# Altium PCB PCB1.PcbDoc (part 2 of 2)
Units mm, origin at the board's own origin, x right, y up, seen from the top; angles counter-clockwise.
Board outline 48.25 x 48.25 mm, 4 copper layers (Top Layer, Mid Layer 1, Mid Layer 2, Bottom Layer), stack 1.57 mm thick; 80 components, 62 nets, 377 pads, 167 vias.
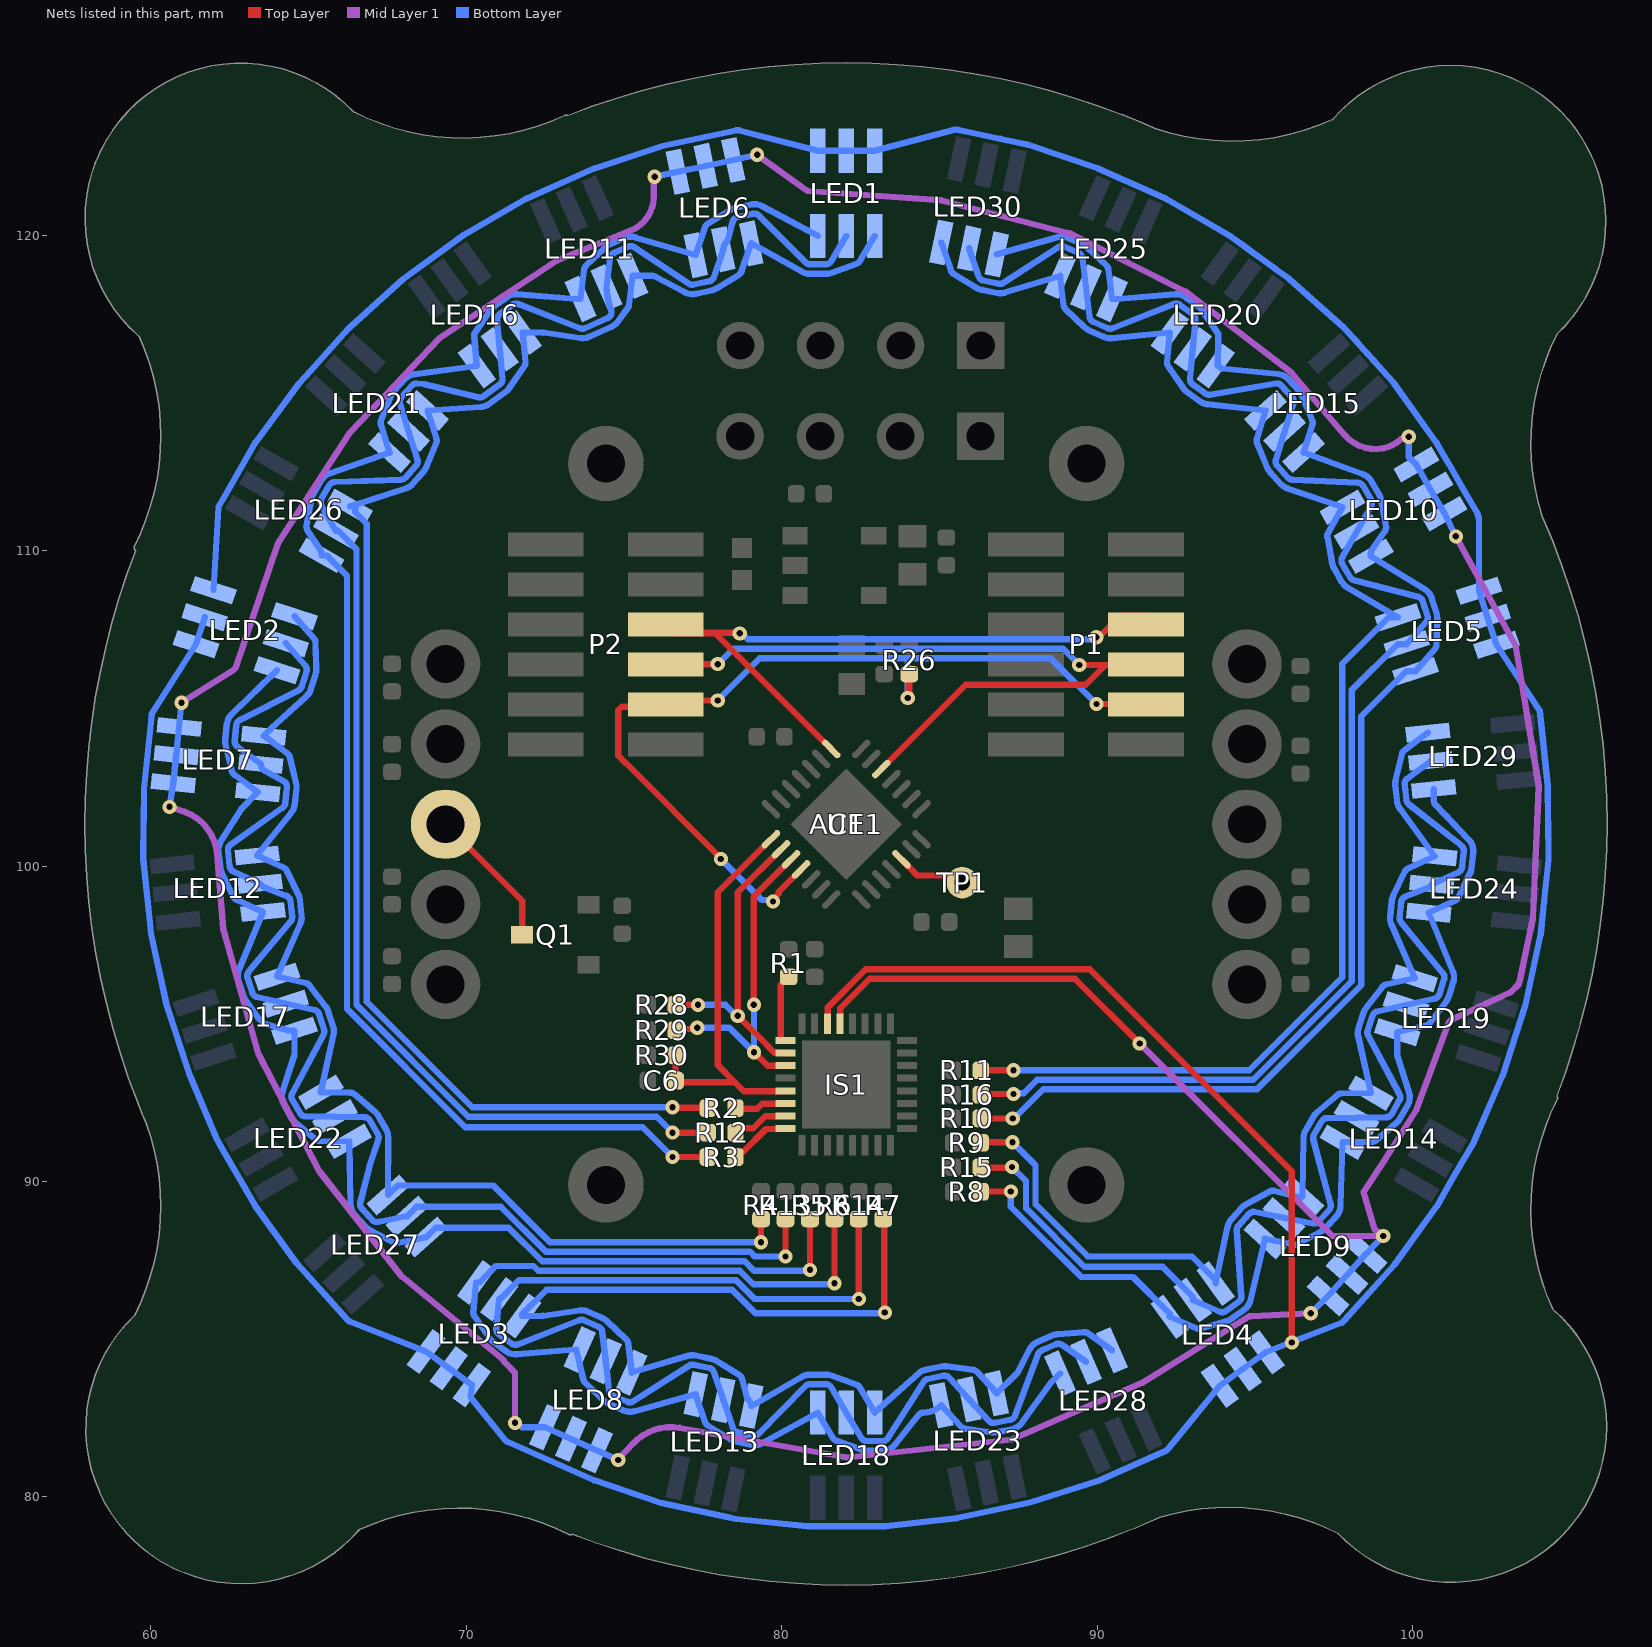
[diagram p4: the nets of this part, all layers, seen from the top]

## Via types
v1: diameter 0.45, hole 0.2, Top Layer to Bottom Layer, 130 vias
v2: diameter 0.6, hole 0.3, Top Layer to Bottom Layer, 24 vias
v3: diameter 6, hole 4, Top Layer to Bottom Layer, 4 vias
v4: diameter 0.5, hole 0.2, Top Layer to Bottom Layer, 4 vias
v5: diameter 0.66, hole 0.33, Top Layer to Bottom Layer, tented top, 4 vias
v6: diameter 0.7, hole 0.5, Top Layer to Bottom Layer, 1 vias

## Nets (pads, with @x,y where several pads share a name; then routed paths per layer and width w, separated by ;. In a path a pad name is that pad's centre, name@x,y a point inside that pad or via, vN(x,y) a via of type N, cw(c..) or ccw(c..) an arc to the next point about the centre after c; other vN are vias at no path point) (continued)
NetIS1_21: IS1.21 LED6.1 LED6.3 LED6.5 LED7.1 LED7.3 LED7.5 LED8.1 LED8.3 LED8.5 LED9.1 LED9.3 LED9.5 LED10.1 LED10.3 LED10.5 | length 157.6
  Top Layer w0.2: IS1.21@81.85,95 81.86,95.01 81.86,95.49 82.797,96.426 89.299,96.426 v1(91.35,94.375)
  Mid Layer 1 w0.2: v1@60.601,101.875 60.612,101.876 cw(c60.616,101.676) 60.686,101.863 61.083,101.717 61.085,101.716 cw(c60.549,100.25) 62.104,100.383 62.104,100.382 62.3,98 62.305,97.981 63.425,94.025 63.434,94.007 65.35,90.325 65.361,90.31 67.944,87.008 67.959,86.992 67.967,86.986 71.166,84.353 71.204,84.315 71.219,84.275 71.55,83.944 v1(71.55,82.35) ; v1(60.975,105.175) 62.616,106.212 62.634,106.224 ; 62.683,106.273 64.042,110.227 64.05,110.25 66.315,113.735 66.325,113.75 69.159,116.733 69.161,116.735 ; 69.177,116.751 69.244,116.796 72.884,119.196 cw(c72.994,119.029) 72.919,119.215 75.216,120.144 75.217,120.145 ccw(c74.778,121.231) 75.95,121.23 75.95,121.233 75.95,121.825 v1(75.975,121.85) ; v1(74.825,81.175) cw(c75.005,81.087) 74.858,81.223 75.3,81.698 cw(c76.485,80.597) 76.767,82.19 76.769,82.19 81.985,81.266 82.064,81.252 82.093,81.252 82.104,81.253 87.3,81.825 87.328,81.837 91.45,83.625 91.463,83.633 94.825,85.725 94.877,85.728 v1(96.775,85.825) ; v1(79.225,122.55) 80.779,121.433 80.825,121.4 85.057,121.101 85.075,121.1 89.129,120.055 89.15,120.05 89.198,120.026 92.808,118.208 92.825,118.2 92.85,118.181 96.14,115.658 ; v1(91.35,94.375) 97.45,88.275 v1(99.075,88.275) 98.797,88.487 98.45,89.675 98.483,89.725 99.068,90.614 100.125,92.275 100.132,92.295 101.162,95.064 101.217,95.12 101.25,95.135 103.112,95.998 103.377,96.263 103.374,96.302 ccw(c103.202,96.404) 103.398,96.362 103.819,98.361 103.82,98.401 103.998,102.525 103.283,106.925 103.275,106.975 103.259,107.005 v1(101.375,110.45) ; 96.17,115.629 97.844,113.666 ccw(c98.818,114.501) 99.073,113.244 99.076,113.245 ccw(c98.844,114.372) 99.605,113.508 cw(c99.737,113.358) 99.737,113.558 99.834,113.558 v1(99.882,113.606)
  Bottom Layer w0.2: v1(60.6,101.875) LED7.1@60.713,102.621 LED7.3@60.807,103.516 LED7.5@60.901,104.411 v1(60.975,105.175) ; v1(71.55,82.35) 71.618,82.35 71.76,82.208 LED8.5@72.504,82.208 LED8.3@73.326,81.842 LED8.1@74.148,81.476 v1(74.825,81.175) ; v1(75.975,121.85) LED6.1@76.714,122.008 LED6.3@77.594,122.195 LED6.5@78.475,122.383 v1(79.225,122.55) ; v1(96.775,85.825) LED9.5@97.326,86.378 LED9.3@97.928,87.047 LED9.1@98.53,87.716 v1(99.075,88.275) ; v1(99.882,113.606) 99.882,112.966 LED10.1@100.119,112.729 LED10.3@100.569,111.95 LED10.5@101.019,111.171 v1(101.375,110.45)
NetIS1_22: IS1.22 LED1.1 LED1.3 LED1.5 LED2.1 LED2.3 LED2.5 LED3.1 LED3.3 LED3.5 LED4.1 LED4.3 LED4.5 LED5.1 LED5.3 LED5.5 | length 163.5
  Top Layer w0.2: IS1.22@81.45,95 81.46,95.01 81.46,95.516 82.672,96.728 89.772,96.728 96.175,90.325 v1(96.175,84.9)
  Bottom Layer w0.2: LED2.3@61.716,107.892 LED2.1@61.438,107.036 60.038,104.825 60.01,104.559 59.789,102.456 59.764,100.313 59.764,100.219 59.978,98.189 60.013,97.85 60.493,95.653 61.229,93.389 62.123,91.292 62.291,91.001 63.313,89.23 64.63,87.406 66.225,85.635 66.288,85.572 LED3.5@68.728,84.612 LED3.3@69.456,84.083 LED3.1@70.185,83.554 LED3.1@70.152,83.23 ; LED2.5@61.994,108.748 62.148,111.383 62.311,111.666 63.338,113.445 64.68,115.269 64.915,115.53 66.275,117.04 66.338,117.103 68.008,118.611 68.149,118.714 69.935,120.011 71.899,121.149 72.133,121.253 74.074,122.117 76.224,122.826 76.526,122.89 78.552,123.321 78.657,123.321 LED1.1@81.15,122.675 LED1.3@82.05,122.675 LED1.5@82.95,122.675 85.475,123.339 ; LED3.1@70.152,83.229 ccw(c70.351,83.209) 70.195,83.084 71.235,81.809 ccw(c71.389,81.936) 71.308,81.753 74.049,80.533 76.224,79.799 78.237,79.371 78.552,79.304 80.816,79.073 83.284,79.073 85.548,79.329 85.786,79.38 87.876,79.824 90.026,80.508 92.201,81.476 92.286,81.561 LED4.5@93.89,83.529 LED4.3@94.619,84.058 LED4.1@95.347,84.587 96.172,84.907 97.762,85.522 97.825,85.585 99.42,87.356 100.762,89.205 101.314,90.161 101.952,91.267 102.846,93.339 103.582,95.603 104.062,97.825 104.171,98.868 104.311,100.194 104.311,100.288 104.286,102.556 104.037,104.925 LED5.5@102.662,107.011 LED5.3@102.384,107.867 LED5.1@102.106,108.723 102.106,110.993 ccw(c101.906,110.993) 102.096,111.054 102.066,111.15 ccw(c101.875,111.091) 102.048,111.192 101.675,111.837 ccw(c101.5,111.737) 101.675,111.838 101.225,112.616 ccw(c101.05,112.517) 101.225,112.618 101.025,112.963 ; 85.569,123.341 86.056,123.238 ; 86.058,123.237 86.937,123.051 ; 86.938,123.05 87.817,122.863 ; 87.842,122.857 90.047,122.107 ; 90.066,122.099 91.709,121.368 ; 91.71,121.367 92.166,121.164 ; 92.186,121.154 94.2,119.984 ; 94.218,119.973 94.623,119.679 ; 94.623,119.678 94.945,119.444 ; 94.946,119.444 95.351,119.15 ; 95.351,119.149 95.674,118.915 ; 95.674,118.915 96.079,118.621 ; 96.095,118.608 97.838,117.052 ; 97.854,117.036 98.188,116.665 98.456,116.368 98.791,115.996 99.058,115.699 ; 99.058,115.699 99.393,115.327 ; 99.407,115.309 100.764,113.414 ; 100.775,113.397 101.025,112.964
NetIS1_25: IS1.25 R1.1 | length 2.3
  Top Layer w0.2: IS1.25@80.125,94.475 79.985,94.475 79.975,94.485 79.975,96.235 80.064,96.324 80.064,96.327 80.221,96.485 R1.1@80.225,96.485
NetIS1_30: IS1.30 R2.1 | length 1.6
  Top Layer w0.2: R2.1@78.545,92.304 79.224,92.304 79.386,92.466 IS1.30@80.117,92.466
NetIS1_31: IS1.31 R12.1 | length 1.8
  Top Layer w0.2: R12.1@78.545,91.542 78.693,91.69 79.105,91.69 79.481,92.066 IS1.31@80.117,92.066
NetIS1_32: IS1.32 R3.1 | length 1.9
  Top Layer w0.2: R3.1@78.545,90.78 78.545,90.784 78.703,90.941 78.783,90.941 79.508,91.666 IS1.32@80.117,91.666
NetLED1_2: LED1.2 LED6.2 LED11.2 LED16.2 LED21.2 LED26.2 R3.2 | length 53
  Top Layer w0.2: v1@76.55,90.775 R3.2@77.66,90.775
  Bottom Layer w0.2: v1@76.55,90.775 75.6,91.725 69.975,91.725 66.225,95.475 66.225,109.204 65.584,109.846 LED26.2@65.419,109.846 65.419,109.894 ccw(c65.219,109.894) 65.386,110.003 64.969,110.649 cw(c65.138,110.758) 64.94,110.795 65.093,111.629 cw(c65.588,111.538) 65.151,111.788 65.403,112.224 cw(c65.838,111.971) 65.674,112.447 LED21.2@67.576,113.103 67.298,113.994 cw(c67.491,114.054) 67.304,114.131 67.628,114.915 cw(c68.093,114.723) 67.719,115.06 68.054,115.431 cw(c68.428,115.095) 68.362,115.594 70.327,115.854 LED16.2@70.34,115.854 70.254,116.784 cw(c70.455,116.802) 70.289,116.916 70.767,117.615 cw(c71.183,117.331) 70.887,117.738 71.292,118.032 cw(c71.587,117.625) 71.629,118.127 73.498,117.976 ccw(c73.514,118.176) 73.514,117.976 LED11.2@73.627,117.976 73.736,118.903 cw(c73.936,118.88) 73.797,119.026 74.411,119.61 cw(c74.758,119.246) 74.553,119.705 75.011,119.909 cw(c75.215,119.449) 75.359,119.931 LED6.2@77.275,119.367 77.575,120.252 cw(c77.766,120.187) 77.66,120.359 78.382,120.803 cw(c78.645,120.376) 78.542,120.867 79.03,120.97 cw(c79.135,120.48) 79.135,120.981 cw(c79.136,120.48) 79.373,120.922 LED1.2@81.15,119.975
  other v1: 76.544,90.775
NetLED1_4: LED1.4 LED6.4 LED11.4 LED16.4 LED21.4 LED26.4 R12.2 | length 57.1
  Top Layer w0.2: v1@76.55,91.55 R12.2@77.66,91.55
  Bottom Layer w0.2: 68.649,115.28 68.648,115.28 68.443,115.296 ccw(c68.428,115.095) 68.278,115.23 67.943,114.858 ccw(c68.093,114.723) 67.901,114.663 LED21.4@68.178,113.772 68.456,112.881 cw(c68.264,112.82) 68.413,112.685 68.079,112.314 cw(c67.929,112.449) 67.936,112.247 65.832,112.172 ccw(c65.838,111.971) 65.663,112.072 65.413,111.639 ccw(c65.588,111.538) 65.412,111.439 LED26.4@65.869,110.625 65.941,110.625 66.527,110.04 66.527,95.6 70.072,92.055 76.045,92.055 v1@76.55,91.55 ; 68.68,115.275 70.386,114.859 ccw(c70.433,115.054) 70.55,114.892 71.073,115.271 ccw(c70.954,115.434) 71.155,115.453 LED16.4@71.069,116.383 70.982,117.313 cw(c71.183,117.331) 71.064,117.494 71.469,117.788 cw(c71.587,117.625) 71.662,117.812 73.609,117.047 ccw(c73.683,117.234) 73.765,117.05 74.49,117.373 ccw(c74.409,117.556) 74.596,117.625 cw(c76.896,118.47) LED11.4@74.449,118.342 74.558,119.269 cw(c74.758,119.246) 74.676,119.43 75.133,119.633 cw(c75.215,119.449) 75.327,119.616 77.065,118.463 ccw(c77.176,118.631) 77.218,118.434 77.707,118.537 ccw(c77.665,118.735) 77.856,118.67 LED6.4@78.156,119.555 cw(c78.46,119.555) 78.245,119.77 ccw(c78.104,119.912) 78.297,119.86 78.43,120.349 78.437,120.375 ; 78.438,120.377 78.451,120.426 cw(c78.644,120.375) 78.504,120.517 cw(c78.645,120.376) 78.605,120.572 79.094,120.676 cw(c79.135,120.48) 79.136,120.68 cw(c79.136,120.48) 79.278,120.621 79.294,120.604 cw(c79.153,120.463) 79.305,120.593 79.337,120.555 ccw(c79.488,120.686) 79.347,120.545 80.742,119.15 ccw(c80.9,119.275) 80.746,119.144 ccw(c80.9,119.275) 80.9,119.073 81.4,119.073 ccw(c81.4,119.275) 81.574,119.172 LED1.4@82.05,119.975
  other v1: 76.544,91.55
NetLED1_6: LED1.6 LED6.6 LED11.6 LED16.6 LED21.6 LED26.6 R2.2 | length 51.7
  Top Layer w0.2: v1(76.544,92.357) 76.56,92.341 77.644,92.341 R2.2@77.66,92.325
  Bottom Layer w0.2: LED26.6@66.319,111.404 66.484,111.404 66.484,111.213 66.85,110.847 66.85,95.703 70.196,92.357 v1(76.544,92.357) ; LED26.6@66.469,111.452 68.082,111.969 ccw(c67.929,112.449) 68.303,112.112 68.637,112.484 ccw(c68.264,112.82) 68.729,112.629 69.052,113.412 ccw(c68.866,113.489) 69.058,113.55 LED21.6@68.78,114.441 70.466,114.553 ccw(c70.433,115.054) 70.728,114.648 71.25,115.027 ccw(c70.954,115.434) 71.37,115.151 71.849,115.85 ccw(c71.682,115.963) 71.883,115.982 LED16.6@71.797,116.912 72.423,116.912 cw(c72.423,116.712) 72.454,116.91 73.609,116.737 ccw(c73.683,117.234) 73.887,116.774 74.613,117.098 ccw(c74.409,117.556) 74.814,117.26 ; 74.814,117.26 75.125,117.685 ccw(c74.962,117.804) 75.163,117.781 LED11.6@75.271,118.708 75.907,118.708 cw(c75.907,118.508) 76.001,118.684 76.941,118.186 ccw(c77.176,118.631) 77.281,118.138 77.771,118.243 ccw(c77.665,118.735) 77.929,118.306 78.651,118.75 ccw(c78.546,118.922) 78.737,118.857 LED6.6@79.036,119.742 80.654,118.836 ccw(c80.9,119.275) 80.9,118.772 81.4,118.772 ccw(c81.4,119.275) 81.569,118.801 82.368,119.085 ccw(c82.3,119.275) 82.474,119.172 LED1.6@82.95,119.975
NetLED2_2: LED2.2 LED7.2 LED12.2 LED17.2 LED22.2 LED27.2 R5.2 | length 39.2
  Top Layer w0.2: v1(80.9,87.2) R5.2@80.9,88.81
  Bottom Layer w0.2: 62.873,101.806 62.226,100.78 ccw(c62.651,100.512) 62.151,100.459 62.187,100.118 62.203,99.962 ccw(c62.703,100.014) 62.25,99.797 62.616,99.032 ccw(c62.798,99.119) 62.713,98.936 LED12.2@63.562,98.546 62.799,96.714 ccw(c63.263,96.52) 62.784,96.366 62.939,95.889 ccw(c63.417,96.044) 63.007,95.752 63.4,95.2 63.552,95.046 ccw(c63.695,95.188) 63.64,94.994 64.344,94.794 ccw(c64.399,94.986) 64.399,94.786 LED17.2@64.562,94.786 64.562,94.055 cw(c64.362,94.055) 64.552,93.993 64.184,92.85 ccw(c64.663,92.696) 64.226,92.446 64.478,92.01 ccw(c64.913,92.263) 64.587,91.88 65.232,91.33 ccw(c65.363,91.483) 65.36,91.282 LED22.2@66.294,91.271 66.335,89.279 ccw(c66.839,89.29) 66.464,88.954 66.8,88.58 ccw(c67.173,88.918) 66.934,88.475 67.679,88.072 ccw(c67.775,88.249) 67.815,88.051 LED27.2@68.73,88.234 69.032,88.536 71.345,88.536 72.409,87.472 78.828,87.472 79.127,87.173 80.873,87.173 v1(80.9,87.2) ; 62.9,101.84 LED7.2@63.399,102.339 62.65,102.897 cw(c62.77,103.058) 62.574,103.011 62.375,103.835 cw(c62.864,103.953) 62.364,104.004 62.416,104.505 cw(c62.917,104.451) 62.567,104.813 LED2.2@64.006,106.202
NetLED2_4: LED2.4 LED7.4 LED12.4 LED17.4 LED22.4 LED27.4 R13.2 | length 42.7
  Top Layer w0.2: v1(80.125,87.625) R13.2@80.125,88.81
  Bottom Layer w0.2: LED2.4@64.284,107.058 64.9,106.357 cw(c64.749,106.223) 64.941,106.161 64.87,105.945 64.786,105.686 cw(c64.594,105.748) 64.685,105.568 62.826,104.631 ccw(c62.917,104.451) 62.716,104.472 62.664,103.975 ccw(c62.864,103.953) 62.744,103.792 LED7.4@63.493,103.234 ccw(c63.751,103.234) 63.568,103.051 ccw(c63.71,103.193) 63.615,103.017 64.216,102.692 cw(c64.121,102.514) 64.321,102.493 64.303,102.317 64.269,101.996 cw(c64.069,102.017) 64.186,101.853 62.534,100.676 ccw(c62.651,100.512) 62.451,100.491 62.503,99.993 ccw(c62.703,100.014) 62.619,99.831 LED12.4@63.468,99.441 63.54,99.369 ccw(c63.682,99.51) 63.61,99.323 64.303,99.056 cw(c64.232,98.868) 64.432,98.889 64.484,98.392 cw(c64.284,98.371) 64.438,98.241 63.108,96.649 ccw(c63.263,96.52) 63.071,96.457 63.226,95.982 ccw(c63.417,96.044) 63.373,95.847 LED17.4@64.284,95.642 65.194,95.437 cw(c65.151,95.24) 65.342,95.303 65.497,94.827 cw(c65.305,94.765) 65.483,94.67 64.485,92.791 ccw(c64.663,92.696) 64.488,92.595 64.738,92.162 ccw(c64.913,92.263) 64.91,92.061 LED22.4@65.844,92.05 66.777,92.039 cw(c66.775,91.837) 66.95,91.938 67.2,91.505 cw(c67.025,91.404) 67.217,91.341 66.954,90.537 ; 66.95,90.525 66.643,89.34 ccw(c66.839,89.29) 66.689,89.155 67.023,88.783 ccw(c67.173,88.918) 67.213,88.72 LED27.4@68.128,88.903 68.429,89.204 71.103,89.204 72.534,87.773 79.002,87.773 79.152,87.623 80.123,87.623 v1(80.125,87.625)
NetLED2_6: LED2.6 LED7.6 LED12.6 LED17.6 LED22.6 LED27.6 R4.2 | length 36.8
  Top Layer w0.2: v1(79.35,88.075) R4.2@79.35,88.81
  Bottom Layer w0.2: LED2.6@64.562,107.914 65.178,107.213 cw(c65.027,107.079) 65.228,107.085 65.252,106.239 cw(c64.749,106.223) 65.227,106.067 65.073,105.593 cw(c64.594,105.748) 64.933,105.376 63.825,104.367 ccw(c63.96,104.219) 63.818,104.36 LED7.6@63.587,104.129 64.335,103.571 cw(c64.215,103.409) 64.411,103.456 64.61,102.633 cw(c64.121,102.514) 64.621,102.461 64.569,101.965 cw(c64.069,102.017) 64.462,101.703 LED12.6@63.374,100.336 64.221,99.946 cw(c64.138,99.763) 64.32,99.85 64.685,99.086 cw(c64.232,98.868) 64.732,98.92 64.784,98.424 cw(c64.284,98.371) 64.744,98.167 LED17.6@64.006,96.498 64.916,96.293 cw(c64.872,96.096) 65.033,96.219 65.548,95.548 cw(c65.151,95.24) 65.629,95.395 65.783,94.921 cw(c65.305,94.765) 65.796,94.657 LED22.6@65.394,92.829 66.327,92.818 cw(c66.325,92.617) 66.456,92.77 67.1,92.221 cw(c66.775,91.837) 67.212,92.088 67.461,91.657 cw(c67.025,91.404) 67.529,91.402 67.526,89.646 LED27.6@67.526,89.572 67.563,89.609 67.827,89.873 70.861,89.873 72.659,88.075 v1(79.35,88.075)
NetLED3_2: LED3.2 LED8.2 LED13.2 LED18.2 LED23.2 LED28.2 R7.2 | length 38.7
  Top Layer w0.2: R7.2@83.225,88.81 83.25,88.785 83.25,85.875 v1(83.275,85.85)
  Bottom Layer w0.2: v1(83.275,85.85) 83.248,85.823 79.174,85.823 78.43,86.567 72.55,86.567 71.772,85.789 LED3.2@71.772,85.738 72.398,85.738 ccw(c72.398,85.938) 72.428,85.74 73.583,85.913 cw(c73.658,85.416) 73.864,85.875 74.319,85.672 cw(c74.115,85.212) 74.463,85.576 75.076,84.993 cw(c74.937,84.846) 75.138,84.869 LED8.2@75.246,83.942 77.031,84.476 cw(c77.176,83.994) 77.281,84.486 77.614,84.416 77.769,84.383 cw(c77.665,83.89) 77.93,84.319 78.651,83.875 cw(c78.546,83.703) 78.74,83.756 78.906,83.16 ccw(c79.099,83.214) 78.958,83.072 cw(c78.77,82.883) LED13.2@79.036,82.883 80.648,83.811 cw(c80.9,83.375) 80.9,83.878 81.4,83.878 cw(c81.4,83.375) 81.57,83.849 82.367,83.565 cw(c82.3,83.375) 82.474,83.477 LED18.2@82.95,82.675 84.339,83.916 cw(c84.674,83.541) 84.569,84.033 85.057,84.137 cw(c85.163,83.645) 85.23,84.144 86.069,84.032 cw(c86.043,83.832) 86.192,83.968 LED23.2@86.825,83.283 87.447,83.905 ccw(c87.306,84.047) 87.484,83.955 87.87,84.689 cw(c88.316,84.455) 88.111,84.915 88.568,85.118 cw(c88.772,84.658) 88.735,85.16 89.578,85.225 cw(c89.595,85.024) 89.712,85.189 LED28.2@90.473,84.649
NetLED3_4: LED3.4 LED8.4 LED13.4 LED18.4 LED23.4 LED28.4 R14.2 | length 43.2
  Top Layer w0.2: v1(82.45,86.275) R14.2@82.45,88.81
  Bottom Layer w0.2: v1(82.45,86.275) 79.148,86.275 78.555,86.869 71.674,86.869 71.073,86.267 LED3.4@71.044,86.267 70.957,85.337 ccw(c71.158,85.319) 71.039,85.156 71.444,84.862 ccw(c71.562,85.025) 71.637,84.837 73.584,85.603 cw(c73.658,85.416) 73.74,85.6 74.029,85.471 74.197,85.396 cw(c74.115,85.212) 74.315,85.235 LED8.4@74.424,84.308 74.533,83.381 ccw(c74.733,83.404) 74.651,83.22 75.108,83.017 ccw(c75.19,83.201) 75.299,83.031 77.067,84.164 cw(c77.176,83.994) 77.218,84.191 77.707,84.088 cw(c77.665,83.89) 77.857,83.954 LED13.4@78.156,83.07 78.455,82.186 ccw(c78.646,82.251) 78.604,82.053 79.093,81.95 ccw(c79.135,82.147) 79.279,82.006 80.756,83.516 cw(c80.9,83.375) 80.9,83.577 81.4,83.577 cw(c81.4,83.375) 81.574,83.477 LED18.4@82.05,82.675 82.527,81.872 ccw(c82.7,81.975) 82.7,81.773 83.2,81.773 ccw(c83.2,81.975) 83.37,81.867 84.504,83.649 cw(c84.674,83.541) 84.632,83.738 85.121,83.842 cw(c85.163,83.645) 85.312,83.781 LED23.4@85.944,83.095 86.577,82.409 ccw(c86.726,82.546) 86.768,82.349 87.257,82.453 ccw(c87.215,82.65) 87.404,82.58 88.127,84.525 cw(c88.316,84.455) 88.234,84.639 88.69,84.843 cw(c88.772,84.658) 88.89,84.822 LED28.4@89.651,84.283
NetLED3_6: LED3.6 LED8.6 LED13.6 LED18.6 LED23.6 LED28.6 R6.2 | length 38.7
  Top Layer w0.2: v1(81.675,86.775) R6.2@81.675,88.81
  Bottom Layer w0.2: v1(81.675,86.775) 81.648,86.748 79.102,86.748 78.68,87.17 72.284,87.17 72.129,87.325 70.946,87.325 70.417,86.796 LED3.6@70.315,86.796 70.229,85.866 ccw(c70.43,85.848) 70.264,85.734 70.743,85.034 ccw(c71.158,85.319) 70.861,84.913 71.268,84.617 ccw(c71.562,85.025) 71.603,84.523 73.472,84.674 cw(c73.489,84.474) 73.489,84.674 73.495,84.649 73.715,83.724 ccw(c73.911,83.77) 73.772,83.624 74.386,83.04 ccw(c74.733,83.404) 74.527,82.945 74.985,82.741 ccw(c75.19,83.201) 75.325,82.716 LED13.6@77.275,83.258 77.575,82.373 ccw(c77.766,82.438) 77.66,82.266 78.382,81.822 ccw(c78.646,82.251) 78.54,81.759 79.032,81.654 ccw(c79.135,82.147) 79.377,81.706 LED18.6@81.15,82.675 81.627,81.872 ccw(c81.8,81.975) 81.732,81.785 82.531,81.501 ccw(c82.7,81.975) 82.7,81.472 83.2,81.472 ccw(c83.2,81.975) 83.593,81.661 84.344,82.6 cw(c84.501,82.475) 84.501,82.675 ccw(c84.501,83.472) LED23.6@85.064,82.908 85.697,82.222 ccw(c85.845,82.359) 85.819,82.159 86.659,82.047 ccw(c86.726,82.546) 86.83,82.054 87.32,82.158 ccw(c87.215,82.65) 87.622,82.355 88.543,83.628 cw(c88.705,83.511) 88.564,83.652 LED28.6@88.829,83.917
NetLED4_2: LED4.2 LED9.2 LED14.2 LED19.2 LED24.2 LED29.2 R9.2 | length 33.6
  Top Layer w0.2: R9.2@86.315,91.225 86.334,91.244 v1(87.32,91.244)
  Bottom Layer w0.2: v1(87.32,91.244) 88.05,90.514 88.05,90.137 88.052,90.135 88.052,89.275 89.702,87.625 93.005,87.625 93.76,86.871 LED4.2@93.76,86.771 94.14,88.571 cw(c94.632,88.467) 94.258,88.804 94.593,89.175 cw(c94.967,88.839) 94.727,89.281 95.473,89.685 cw(c95.569,89.508) 95.619,89.703 96.474,89.485 96.511,89.522 96.511,89.582 cw(c96.711,89.582) 96.511,89.586 96.547,91.389 cw(c97.05,91.379) 96.613,91.629 96.865,92.065 cw(c97.3,91.812) 96.974,92.196 97.619,92.745 cw(c97.75,92.592) 97.748,92.793 LED14.2@98.681,92.804 98.279,94.605 cw(c98.77,94.715) 98.291,94.869 98.446,95.346 cw(c98.924,95.19) 98.526,95.497 99.043,96.169 cw(c99.203,96.046) 99.159,96.243 LED19.2@100.069,96.448 99.33,98.145 cw(c99.791,98.346) 99.29,98.396 99.343,98.897 cw(c99.843,98.843) 99.389,99.06 99.756,99.825 cw(c99.937,99.738) 99.854,99.921 LED24.2@100.701,100.311 99.6,101.82 cw(c100.006,102.117) 99.506,102.064 99.454,102.563 cw(c99.954,102.614) 99.465,102.732 99.664,103.557 cw(c99.86,103.509) 99.74,103.671 LED29.2@100.488,104.229
NetLED4_4: LED4.4 LED9.4 LED14.4 LED19.4 LED24.4 LED29.4 R15.2 | length 37.8
  Top Layer w0.2: R15.2@86.315,90.45 86.328,90.438 87.283,90.438 v1(87.303,90.458)
  Bottom Layer w0.2: v1(87.303,90.458) 87.75,90.01 87.75,89.15 89.6,87.3 92.073,87.3 93.031,86.342 LED4.4@93.031,86.242 93.889,85.873 ccw(c93.969,86.058) 94.087,85.895 94.492,86.189 ccw(c94.373,86.352) 94.574,86.366 94.431,88.453 cw(c94.632,88.467) 94.482,88.602 94.817,88.974 cw(c94.967,88.839) 95.007,89.036 LED9.4@95.922,88.853 96.837,88.67 ccw(c96.877,88.868) 97.027,88.733 97.361,89.105 ccw(c97.211,89.24) 97.406,89.293 96.855,91.326 cw(c97.05,91.379) 96.875,91.48 97.125,91.913 cw(c97.3,91.812) 97.298,92.014 LED14.4@98.231,92.025 99.165,92.036 ccw(c99.162,92.238) 99.337,92.137 99.587,92.57 ccw(c99.412,92.671) 99.589,92.767 98.592,94.619 cw(c98.77,94.715) 98.578,94.777 98.733,95.253 cw(c98.924,95.19) 98.881,95.387 LED19.4@99.791,95.592 100.702,95.797 ccw(c100.658,95.994) 100.849,95.932 101.004,96.407 ccw(c100.812,96.47) 100.968,96.598 99.635,98.218 cw(c99.791,98.346) 99.591,98.367 99.643,98.864 cw(c99.843,98.843) 99.771,99.031 100.465,99.298 ccw(c100.393,99.485) 100.535,99.344 LED24.4@100.607,99.416 101.455,99.806 ccw(c101.372,99.989) 101.572,99.968 101.624,100.466 ccw(c101.424,100.487) 101.548,100.646 99.882,101.959 cw(c100.006,102.117) 99.806,102.096 99.779,102.352 99.754,102.593 cw(c99.954,102.614) 99.834,102.776 LED29.4@100.582,103.334
NetLED4_6: LED4.6 LED9.6 LED14.6 LED19.6 LED24.6 LED29.6 R8.2 | length 32.9
  Top Layer w0.2: R8.2@86.315,89.675 86.34,89.65 86.374,89.684 v1(87.268,89.684)
  Bottom Layer w0.2: v1(87.268,89.684) 87.268,89.205 89.498,86.975 91.141,86.975 92.303,85.813 LED4.6@92.303,85.713 93.161,85.344 ccw(c93.241,85.529) 93.298,85.336 94.111,85.575 ccw(c93.969,86.058) 94.264,85.65 94.67,85.946 ccw(c94.373,86.352) 94.863,86.238 LED9.6@95.32,88.184 96.235,88.001 ccw(c96.275,88.199) 96.371,88.022 97.116,88.425 ccw(c96.877,88.868) 97.251,88.531 97.585,88.903 ccw(c97.211,89.24) 97.714,89.223 LED14.6@97.781,91.246 98.715,91.257 ccw(c98.712,91.458) 98.843,91.305 99.488,91.854 ccw(c99.162,92.238) 99.598,91.986 99.848,92.42 ccw(c99.412,92.671) 99.891,92.826 99.523,93.968 cw(c99.713,94.03) 99.513,94.03 LED19.6@99.513,94.736 100.424,94.941 ccw(c100.38,95.138) 100.539,95.015 101.056,95.687 ccw(c100.658,95.994) 101.136,95.839 101.213,96.076 101.291,96.313 ccw(c100.812,96.47) 101.277,96.662 LED24.6@100.513,98.521 101.362,98.911 ccw(c101.277,99.094) 101.459,99.008 101.825,99.772 ccw(c101.372,99.989) 101.864,99.887 ccw(c101.372,99.989) 101.872,99.937 101.924,100.433 ccw(c101.424,100.487) 101.786,100.836 100.731,101.938 cw(c100.876,102.076) 100.676,102.076 LED29.6@100.676,102.439
NetLED5_2: LED5.2 LED10.2 LED15.2 LED20.2 LED25.2 LED30.2 R11.2 | length 48.5
  Top Layer w0.2: R11.2@86.315,93.525 v1(87.35,93.525)
  Bottom Layer w0.2: LED30.2@85.064,119.767 85.363,118.882 ccw(c85.554,118.947) 85.449,118.775 86.171,118.331 ccw(c86.435,118.76) 86.33,118.267 86.821,118.163 ccw(c86.924,118.656) 87.07,118.174 LED25.2@88.829,118.708 88.938,117.78 ccw(c89.138,117.804) 88.999,117.658 89.613,117.073 ccw(c89.96,117.438) 89.754,116.979 90.212,116.775 ccw(c90.417,117.234) 90.465,116.734 LED20.2@92.303,116.912 92.217,115.982 ccw(c92.418,115.963) 92.251,115.85 92.731,115.15 ccw(c93.146,115.434) 92.849,115.028 93.255,114.733 ccw(c93.55,115.141) 93.496,114.64 LED15.2@95.345,114.441 95.067,113.549 ccw(c95.259,113.489) 95.073,113.412 95.396,112.628 ccw(c95.861,112.82) 95.487,112.485 95.822,112.112 ccw(c96.196,112.449) 96.034,111.972 LED10.2@97.781,111.379 97.324,110.565 ccw(c97.5,110.467) 97.301,110.43 97.455,109.596 ccw(c97.95,109.687) 97.514,109.435 97.764,109.002 ccw(c98.2,109.254) 97.946,108.82 LED5.2@99.538,107.889 99.249,107.889 97.772,106.412 97.772,96.475 94.822,93.525 v1(87.35,93.525)
NetLED5_4: LED5.4 LED10.4 LED15.4 LED20.4 LED25.4 LED30.4 R16.2 | length 53.5
  Top Layer w0.2: R16.2@86.315,92.75 86.34,92.775 v1(87.35,92.775)
  Bottom Layer w0.2: LED30.4@85.944,119.58 86.244,118.695 ccw(c86.435,118.76) 86.393,118.562 86.882,118.459 ccw(c86.924,118.656) 87.034,118.487 88.775,119.618 cw(c88.885,119.449) 88.967,119.633 89.424,119.43 cw(c89.342,119.246) 89.542,119.268 LED25.4@89.651,118.342 89.76,117.414 ccw(c89.96,117.438) 89.878,117.254 90.335,117.05 ccw(c90.417,117.234) 90.491,117.047 92.438,117.812 cw(c92.513,117.625) 92.631,117.788 92.855,117.626 93.036,117.494 cw(c92.917,117.331) 93.118,117.312 LED20.4@93.031,116.383 92.945,115.453 ccw(c93.146,115.434) 93.027,115.271 93.432,114.977 ccw(c93.55,115.141) 93.584,114.942 95.664,115.293 cw(c95.697,115.095) 95.847,115.23 96.182,114.858 cw(c96.032,114.723) 96.224,114.663 LED15.4@95.947,113.772 95.669,112.88 ccw(c95.861,112.82) 95.712,112.685 96.046,112.314 ccw(c96.196,112.449) 96.186,112.247 98.271,112.147 cw(c98.262,111.946) 98.437,112.047 98.687,111.614 cw(c98.512,111.513) 98.688,111.414 LED10.4@98.231,110.6 97.774,109.786 ccw(c97.95,109.687) 97.775,109.586 97.875,109.413 98.025,109.153 ccw(c98.2,109.254) 98.149,109.059 100.176,108.538 cw(c100.126,108.343) 100.318,108.405 100.377,108.225 100.473,107.93 cw(c100.281,107.867) 100.432,107.734 LED5.4@99.816,107.033 99.527,107.033 98.073,105.579 98.073,96.35 94.947,93.223 88.098,93.223 87.671,92.796 87.371,92.796 v1(87.35,92.775)
NetLED5_6: LED5.6 LED10.6 LED15.6 LED20.6 LED25.6 LED30.6 R10.2 | length 49.4
  Top Layer w0.2: R10.2@86.315,92 v1(87.325,92)
  Bottom Layer w0.2: LED30.6@86.825,119.392 88.749,119.933 cw(c88.885,119.449) 89.09,119.908 89.546,119.706 cw(c89.342,119.246) 89.69,119.609 90.302,119.026 cw(c90.164,118.88) 90.364,118.902 LED25.6@90.473,117.976 90.624,117.976 ccw(c90.624,118.176) 90.64,117.976 92.471,118.127 cw(c92.513,117.625) 92.809,118.032 93.212,117.739 cw(c92.917,117.331) 93.333,117.614 93.811,116.917 cw(c93.645,116.802) 93.847,116.797 93.826,115.852 93.864,115.852 93.948,115.769 95.744,115.596 cw(c95.697,115.095) 96.072,115.431 96.406,115.06 cw(c96.032,114.723) 96.498,114.914 96.82,114.132 cw(c96.634,114.054) 96.827,113.994 LED15.6@96.549,113.103 98.433,112.419 cw(c98.262,111.946) 98.698,112.197 98.947,111.765 cw(c98.512,111.513) 99.007,111.603 99.16,110.771 cw(c98.962,110.733) 99.127,110.617 98.717,110.034 ccw(c98.881,109.919) 98.681,109.919 LED10.6@98.681,109.821 100.389,108.772 cw(c100.126,108.343) 100.605,108.497 100.759,108.024 cw(c100.281,107.867) 100.784,107.852 100.761,107.006 cw(c100.559,107.011) 100.711,106.878 LED5.6@100.094,106.177 99.805,106.177 98.375,104.747 98.375,96.225 95.072,92.922 88.297,92.922 87.375,92 v1(87.325,92)
NetTP1_1: TP1.1 U1.5 | length 1.9
  Top Layer w0.2: U1.5@83.798,100.213 83.995,100.017 83.995,100.005 84.299,99.7 85.275,99.7 TP1.1@85.425,99.55
  other v6: 85.725,99.475
R\E\S\E\T\: P1.10 P2.10 R26.2 U1.25 | length 29.9
  Top Layer w0.2: v1(77.975,105.25) 76.46,105.25 76.262,105.052 74.942,105.052 74.825,104.934 74.825,103.5 74.928,103.397 74.928,103.386 75.046,103.268 75.057,103.268 78.075,100.25 v1(78.075,100.225) ; v1(79.725,98.875) 79.725,98.929 79.913,99.117 79.913,99.188 U1.25@80.618,99.893 ; R26.2@83.975,106.01 R26.2@84.05,106.085 84.05,105.375 v1(84,105.325) ; v1(89.982,105.139) 91.283,105.139 91.294,105.15 91.313,105.131 P1.10@91.567,105.385
  Bottom Layer w0.2: v1(77.975,105.25) 79.309,106.584 84.001,106.584 ; v1(78.075,100.225) 79.377,98.923 79.677,98.923 v1(79.725,98.875) ; v1(84,105.325) 84.001,106.584 ; v1(89.982,105.139) 89.97,105.139 88.525,106.584 84.001,106.584
S1: ACE1.3 Q1.3 | length 4.5
  Top Layer w0.2: ACE1.3@69.35,101.325 71.775,98.9 Q1.3@71.775,97.825
S\S\: P1.8 P2.8 U1.12 | length 23.9
  Top Layer w0.2: P2.8@76.327,106.401 v1(77.978,106.401) ; U1.12@83.156,103.071 85.835,105.75 89.646,105.75 90.271,106.375 ; v1(89.434,106.375) 90.271,106.375 ; P1.8@91.287,106.375 90.271,106.375
  Bottom Layer w0.2: v1(77.978,106.401) 78.463,106.886 88.923,106.886 v1(89.434,106.375)
SCK: P1.6 P2.6 U1.15 | length 22.2
  Top Layer w0.2: P2.6@76.33,107.66 76.61,107.38 77.892,107.38 ; P2.6@76.607,107.391 77.881,107.391 ; v1(78.675,107.375) 78.659,107.391 77.881,107.391 ; U1.15@81.573,103.711 81.378,103.906 81.366,103.906 77.892,107.38 ; v1(89.975,107.25) 90.05,107.25 90.735,107.935 P1.6@91.555,107.935 ; 77.881,107.391 77.892,107.38
  Bottom Layer w0.2: v1(78.675,107.375) 78.743,107.375 78.93,107.188 89.845,107.188 89.907,107.25 v1(89.975,107.25)
SCL: IS1.27 R29.2 U1.24 | length 10.6
  Top Layer w0.2: R29.2@76.64,94.8 76.677,94.837 77.287,94.837 v1(77.325,94.875) ; v1(79.121,95.606) 79.121,99.036 U1.24@80.292,100.207 ; v1(79.125,94.1) 79.559,93.666 IS1.27@80.117,93.666
  Bottom Layer w0.2: v1(77.325,94.875) 78.35,94.875 v1(79.125,94.1) 79.125,95.602 v1(79.121,95.606)
SDA: IS1.26 R28.2 U1.23 | length 10
  Top Layer w0.2: R28.2@76.653,95.587 R28.2@76.64,95.6 v1(77.35,95.6) ; U1.23@79.974,100.526 78.613,99.165 v1(78.613,95.251) 79.577,94.287 79.577,94.273 79.765,94.085 80.098,94.085 IS1.26@80.117,94.066
  Bottom Layer w0.2: v1(77.35,95.6) 78.219,95.6 78.568,95.251 v1(78.613,95.251)
SDB: C6.1 IS1.29 R30.1 U1.22 | length 13
  Top Layer w0.2: R30.1@76.64,94 C6.1@76.64,93.2 76.69,93.15 78.521,93.15 ; U1.22@79.656,100.844 77.978,99.166 77.978,93.693 78.521,93.15 ; IS1.29@80.117,92.866 78.805,92.866 78.521,93.15
pads on no net: ACE1. ACE1.8 IS1.14 IS1.15 IS1.16 LD1.4 U1.2 U1.7 U1.26 U1.27 U1.28
copper on no net:
  other v2: 88.725,91.675 71.65,94.425 85.875,94.45 90.5,98.85 72.275,100.6 75.75,100.6 82.475,118.3
  other v3: 62.875,82.175 101.225,82.225 101.2,120.45 62.85,120.525

## Polygon pours and split planes (outlines as drawn)
GND on Mid Layer 1 "NONET_L-01_P-001" (solid, remove dead copper, pour order 10): 81.925,124.125 76.15,123.15 71.7,121.5 67.8,119.1 64.2,115.625 61.575,111.4 60.075,107.2 59.35,102.4 59.625,97.475 60.975,92.925 62.9,88.7 65.8,85.225 69.7,82.1 74.175,80.025 78.95,78.8 83.625,78.55 88.475,79.475 92.8,81.25 96.875,84.1 100.075,87.4 102.65,91.725 104.275,96.025 104.875,100.675 104.45,105.425 103.225,109.7 100.975,114 97.825,117.575 94.15,120.55 89.825,122.7 85.5,123.9
no net on Mid Layer 1 "NONET_L-01_P-001" (solid, remove dead copper, pour order 11): 114.45,111.8
no net on Mid Layer 1 "NONET_L-01_P-001" (solid, remove dead copper, pour order 9): 59.05,123.85
no net on Mid Layer 1 "NONET_L-01_P-001" (solid, remove dead copper, pour order 8): 59.875,123.525
+3.3V on Mid Layer 2 "NONET_L-01_P-001" (solid, remove dead copper, pour order 13): 61.575,111.4 62.257,112.498 101.761,112.498 103.225,109.7 104.45,105.425 104.875,100.675 104.275,96.025 102.65,91.725 100.075,87.4 96.875,84.1 92.8,81.25 88.475,79.475 83.625,78.55 78.95,78.8 74.175,80.025 69.7,82.1 65.8,85.225 62.9,88.7 60.975,92.925 59.625,97.475 59.35,102.4 60.075,107.2
+5 on Mid Layer 2 "NONET_L-01_P-001" (solid, remove dead copper, pour order 12): 64.2,115.625 62.415,112.752 101.628,112.752 100.975,114 97.825,117.575 94.15,120.55 89.825,122.7 85.5,123.9 81.925,124.125 76.15,123.15 71.7,121.5 67.8,119.1
GND on Bottom Layer "NONET_L-01_P-001" (solid, remove dead copper, pour order 14): 81.925,124.125 76.15,123.15 71.7,121.5 67.8,119.1 64.2,115.625 61.575,111.4 60.075,107.2 59.35,102.4 59.625,97.475 60.975,92.925 62.9,88.7 65.8,85.225 69.7,82.1 74.175,80.025 78.95,78.8 83.625,78.55 88.475,79.475 92.8,81.25 96.875,84.1 100.075,87.4 102.65,91.725 104.275,96.025 104.875,100.675 104.45,105.425 103.225,109.7 100.975,114 97.825,117.575 94.15,120.55 89.825,122.7 85.5,123.9
GND on Top Layer "NONET_L-01_P-001" (solid, remove dead copper, pour order 15): 81.925,124.125 76.15,123.15 71.7,121.5 67.8,119.1 64.2,115.625 61.575,111.4 60.075,107.2 59.35,102.4 59.625,97.475 60.975,92.925 62.9,88.7 65.8,85.225 69.7,82.1 74.175,80.025 78.95,78.8 83.625,78.55 88.475,79.475 92.8,81.25 96.875,84.1 100.075,87.4 102.65,91.725 104.275,96.025 104.875,100.675 104.45,105.425 103.225,109.7 100.975,114 97.825,117.575 94.15,120.55 89.825,122.7 85.5,123.9

## Silkscreen, mask and mechanical layers (free items; w line width, h text height)
Top Overlay:
  circle w0.254: c77.1,90.775 r0.06
  circle w0.254: c80.9,88.275 r0.06
  circle w0.254: c83.25,88.275 r0.06
  circle w0.254: c86.86,91.225 r0.06
  circle w0.254: c86.85,93.525 r0.06
  text "DOUT" at 72.429,102.079 h1
  text "DIN" at 88.504,102.079 h1
Mechanical 1:
  circle w0.254: c82.042,101.333 r24
  lines w0.254: 59.603,85.696 ccw(c52.685,89.223) 59.725,92.5 ; 59.603,110.096 ccw(c52.685,113.623) 59.725,116.9 ; 59.608,85.692 ccw(c62.875,82.175) 66.511,79.041 ; 59.739,116.869 cw(c62.85,120.525) 66.315,123.847 ; 66.371,123.797 ccw(c69.898,130.715) 73.175,123.675 ; 66.5,79.05 cw(c69.777,72.01) 73.304,78.928 ; 90.771,123.697 ccw(c94.298,130.615) 97.575,123.575 ; 90.881,79.039 cw(c94.158,71.999) 97.809,78.853 ccw(c101.225,82.225) 104.359,85.861 ; 97.564,123.584 cw(c101.2,120.45) 104.467,116.933 ; 104.35,85.85 cw(c111.39,89.127) 104.472,92.654 ; 104.35,110.125 cw(c111.39,113.402) 104.472,116.929
Mechanical 15:
  circle w0.254: c82.042,101.321 r20
  lines w0.2: 82.042,101.333 82.058,101.333
  lines w0.254: 62.103,101.321 82.042,101.321 ; 82.042,81.382 82.042,101.321 ; 82.042,121.26 82.042,101.321 ; 102.042,101.321 82.042,101.321
Mechanical 21:
  pour cut-out: 55.1,124.05